# Altium PCB PCB4.PcbDoc
Units mm, origin at the board's own origin, x right, y up, seen from the top; angles counter-clockwise.
Board outline 106.55 x 74.17 mm, 2 copper layers (Top Layer, Bottom Layer); 16 components, 12 nets, 36 pads, 1 vias.
Unrouted connection lines stored in the file: 1.
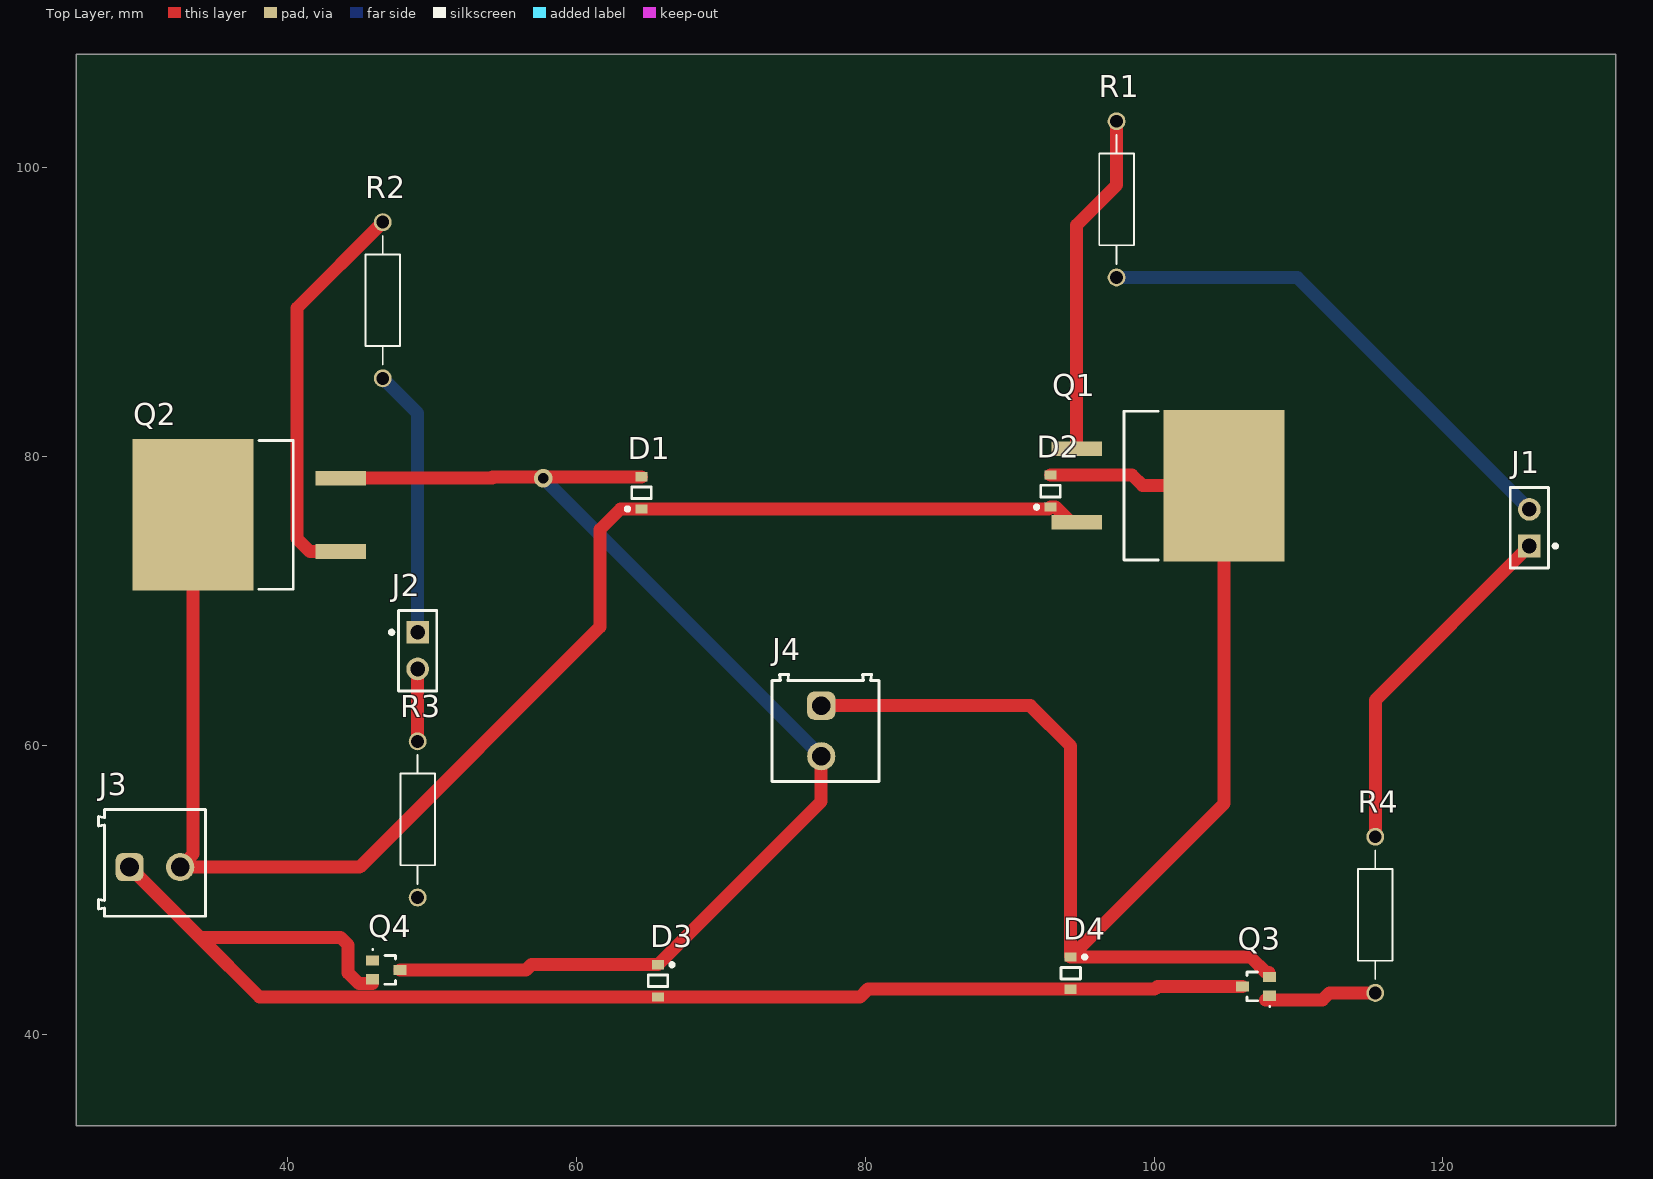
[diagram p0: Top Layer view]
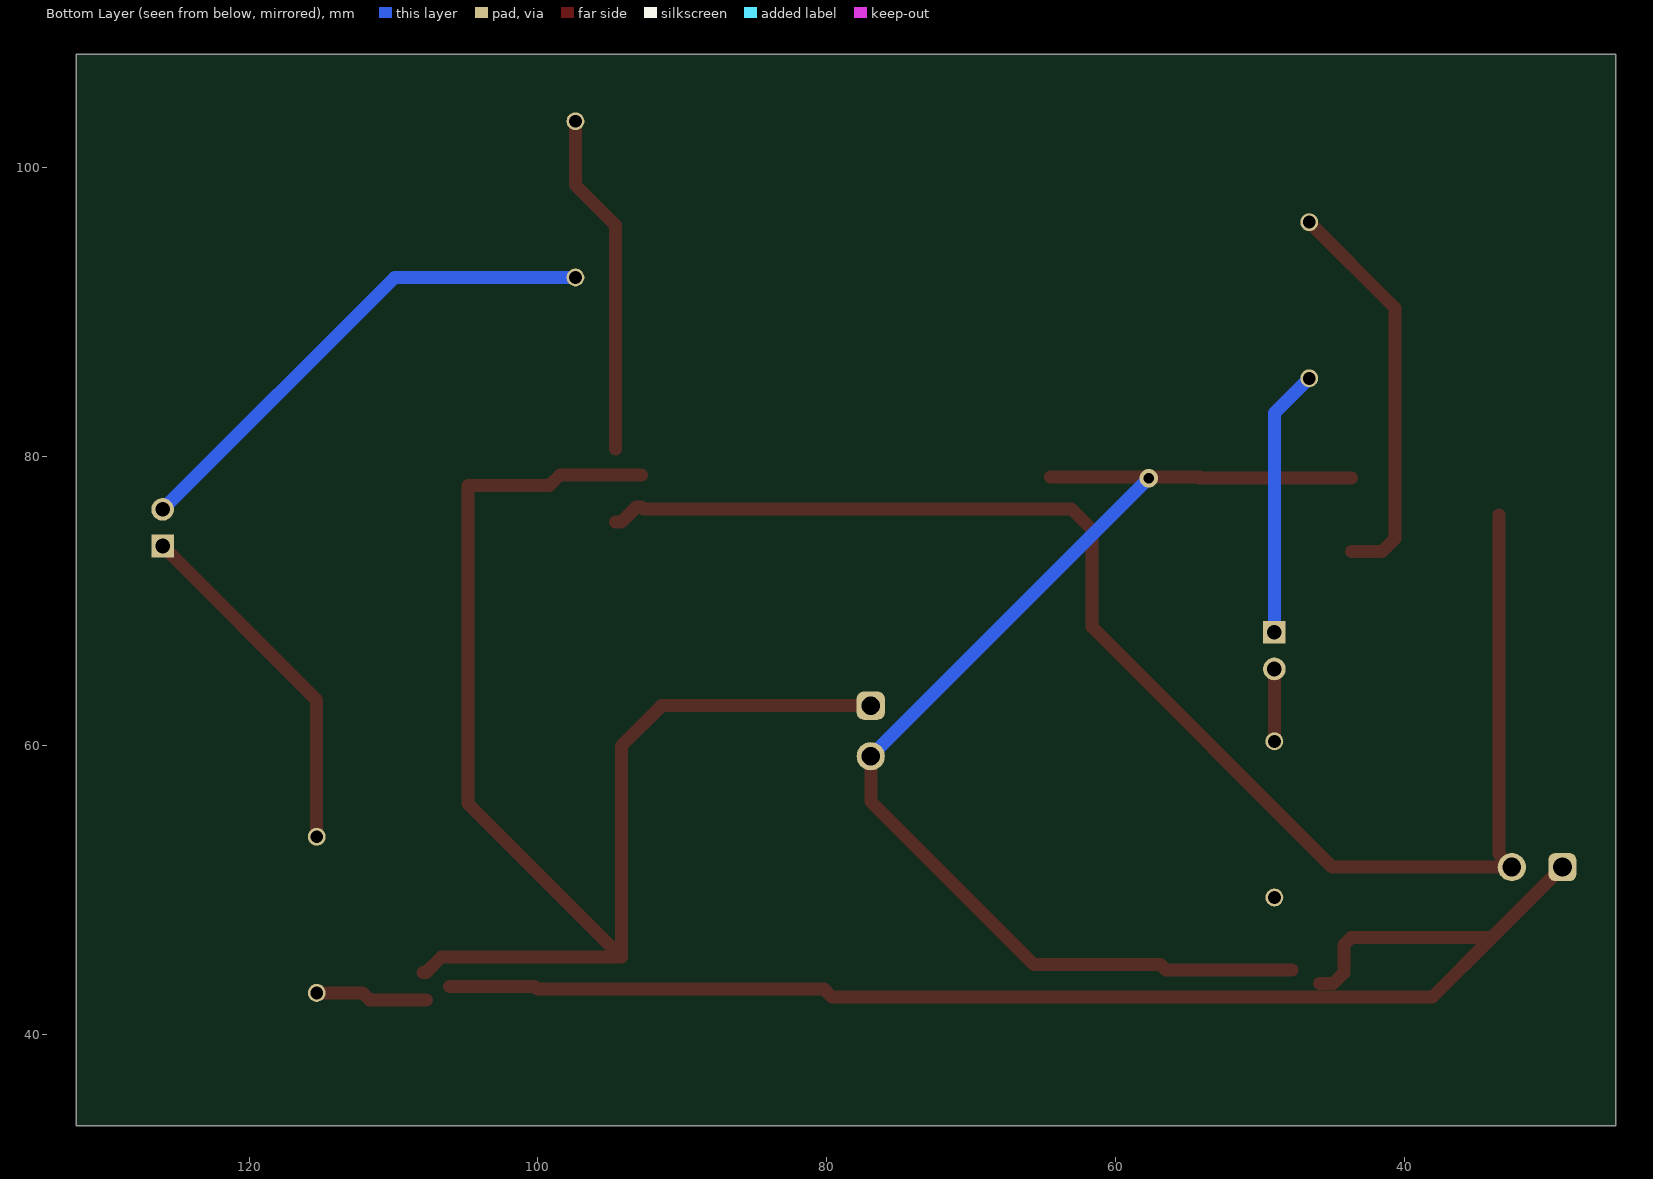
[diagram p1: Bottom Layer view, seen from below]
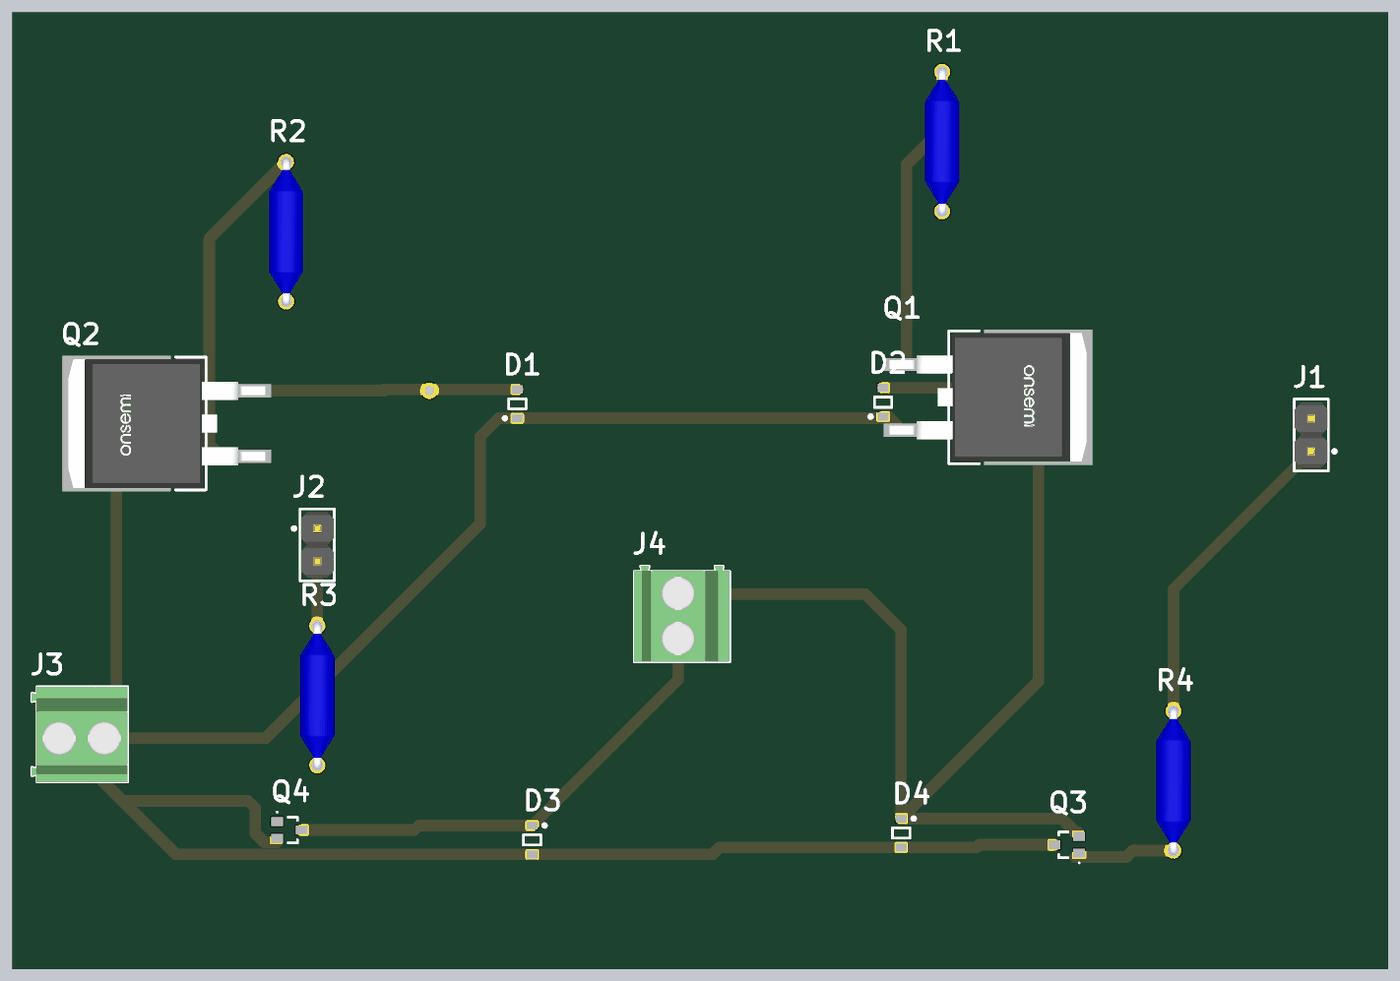
[diagram p2: 3D render of the assembled board from above, using the file's embedded part models]

## Layer stack, top to bottom
Top Solder: solder mask 0.0102, Solder Resist, Dk 3.5
Top Layer: signal copper 0.0356
Dielectric 1: dielectric 0.32, FR-4, Dk 4.8
Bottom Layer: signal copper 0.0356
Bottom Solder: solder mask 0.0102, Solder Resist, Dk 3.5

## Board outline
25.4,33.655 131.953,33.655 131.953,107.823 25.4,107.823

## Design rules (kind name [scope] priority, off if disabled: settings)
Clearance [All] p1: gap=0.8 ignorepadtopadclearanceinfootprint=FALSE
PolygonConnect [All] p1: connectstyle=Relief reliefconductorwidth=0.254 reliefentries=4 polygonreliefangle="90 Angle" airgapwidth=0.254
RoutingVias [All] p1: holewidth=0.711 width=1.27 viastyle="Through Hole" minholewidth=0.711 minwidth=1.27 maxholewidth=0.711 maxwidth=1.27
SolderMaskExpansion [All] p1: expansion=0.102 istentingtop=FALSE
UnRoutedNet [All] p1: checkbadconnections=TRUE
Width [All] p1: maxlimit=1 minlimit=0.75 preferedwidth=0.9
29 further rules are at their usual default settings.

## Components (designator, comment, footprint, x,y, rotation, side; value= is the part's Value field where it differs from the comment)
D1 "BAT54HT1G" ONSC-SOD-323-2-477-02_V 64.516,77.47 r90 top
D2 "BAT54HT1G" ONSC-SOD-323-2-477-02_V 92.837,77.597 r90 top
D3 "BAT54HT1G" ONSC-SOD-323-2-477-02_V 65.659,43.688 r270 top
D4 "BAT54HT1G" ONSC-SOD-323-2-477-02_V 94.234,44.224 r270 top
J1 "M20-9990245" FP-M20-9990245-MFG 125.984,75.057 r90 top
J2 "M20-9990245" FP-M20-9990245-MFG 49.022,66.548 r270 top
J3 "691214110002" 691214110002 30.833,51.862 r0 top
J4 "691214110002" 691214110002 77.262,60.988 r270 top
Q1 "NTB25P06T4G" FP-418B-04-MFG 102.743,77.978 r270 top
Q2 "NTB25P06T4G" FP-418B-04-MFG 35.588,75.946 r90 top
Q3 "2N7002WT1G" ONSC-SC-70-3-419-04_V 107.061,43.307 r180 top
Q4 "2N7002WT1G" ONSC-SC-70-3-419-04_V 46.863,44.45 r0 top
R1 "RNC55H3300BSRE6" RESAD1081W64L635D269 97.409,97.79 r270 top
R2 "RNC55H3300BSRE6" RESAD1081W64L635D269 46.609,90.805 r90 top
R3 "RNC55H3300BSRE6" RESAD1081W64L635D269 49.022,54.864 r270 top
R4 "RNC55H3300BSRE6" RESAD1081W64L635D269 115.316,48.26 r90 top

## Footprints (in the part's own frame and the unit in brackets; to place one, negate y for a bottom-side part, rotate by r counter-clockwise, add the part's x,y. Pads: shape width x height; smd on the part's side, far side on the other; paste and mask are expansions set on the pad)
691214110002 [mm] "3.50 mm Horizontal Entry Modular, 2p"
  rrect50% 1.95x1.95 hole 1.3: 1(-1.75,-0.3)
  round 1.95 hole 1.3: 2(1.75,-0.3)
  silkscreen extent -3.9,-3.7 3.5,3.7, body extent -3.95,-3.7 3.5,3.7, height 8.55
FP-418B-04-MFG [mm]
  rect 1.016x3.504 smd paste+0 mask+0: 1(-2.54,-8.101) 3(2.54,-8.101)
  rect 10.49x8.38 smd paste+0 mask+0: 4(0,2.113)
  silkscreen extent -5.15,-4.82 5.15,-2.45, body extent -5.35,-9.95 5.35,6.4, height 0.25
FP-M20-9990245-MFG [mm]
  rect 1.57x1.57 hole 1.02 paste-2539.97 mask+0: 1(-1.27,0)
  round 1.57 hole 1.02 paste-2539.97 mask+0: 2(1.27,0)
  silkscreen extent -2.79,-1.92 2.79,1.32, body extent -2.89,-1.42 2.89,1.42, height 0.25
ONSC-SC-70-3-419-04_V [mm] "SOT23, 3-Leads, Body 2x1.25mm, Pitch 0.65mm"
  rect 0.9x0.7 smd: 1(-0.95,0.65) 2(-0.95,-0.65) 3(0.95,0)
  silkscreen extent -1,-1 0.62,1.45, body extent -0.63,-1 0.63,1, height 1
ONSC-SOD-323-2-477-02_V [mm] "SOD, 2-Leads, Body 1.7x1.25mm"
  rect 0.63x0.83 smd: 1(-1.115,0) 2(1.115,0)
  silkscreen extent -1.24,-0.67 0.4,1.09, body extent -0.85,-0.63 0.85,0.63, height 1.06
RESAD1081W64L635D269 [mm]
  round 1.24 hole 0.89: 1(-5.405,0) 2(5.405,0)
  silkscreen extent -4.47,-1.2 4.47,1.2, body extent -5.72,-1.35 5.72,1.35, height 2.69

## Part data
D1 D2 D3 D4: library part CMP-1055-00462-1, "Schottky Barrier Diode, 2-Pin SOD-323, Pb-Free, Tape and Reel", Manufacturer="On Semiconductor", ComponentLink1Description="Manufacturer URL", ComponentLink1URL=http://www.onsemi.com/, ComponentLink2Description=Datasheet, ComponentLink2URL=http://www.onsemi.cn/pub_link/Collateral/BAT54HT1-D.PDF, ComponentLink3Description="Package Specification", ComponentLink3URL=http://www.onsemi.com/pub_link/Collateral/477-02.PDF.1, Configuration=Single, DatasheetVersion="Rev. 6", IFSM Max (A)=0.6, Mounting Technology="Surface Mount", PackageDescription="2-Pin SOD, Body 1.7 x 1.25 mm", PackageReference=SOD-323-2-477-02, PackageVersion="Rev. H, 03/2007", Packing="Tape and Reel", PartNumber=BAT54HT1G, RoHS=TRUE, trr Max (ns)=5
J1 J2: library part CMP-15831-000105-1, "CONN HEADER VERT 2POS 2.54MM", Case/Package=SIL, Color=Black, Contact Resistance=25mR, Current=3A, Flammability Rating="UL94 V-0", Insulation Resistance=10GR, Max Operating Temperature=105°C, Min Operating Temperature=-40°C, Package Quantity=1000, Voltage=50V, Voltage Rating (AC)=750V, Connector Type="Male Pin", Contact Finish - Mating=GOLD, Contact Material=Brass, Contact Mating Length=0.24inch, Contact Plating=Gold, Contact Shape=Square, Contact Type="Male Pin", Current Rating=3A, Depth=2.54mm, Fastening Type=Pull, Gender=Male, Height=0.12inch, Housing Color=Black, Housing Material=Nylon, Insulation Color=Black, Insulation Material=Nylon, Lead Pitch=2.54mm, Length=5.08mm, Mated Stacking Heights=16.54mm, Mating Cycles=300, Max Current Rating=3A, Mount="Through Hole", Number of Contacts=2, Number of Poles=2, Number of Positions=2, Number of Rows=1, Orientation=Straight, Packaging=Bulk, Pitch=2.54mm, Radiation Hardening=No, Reach SVHC Compliant=Yes, Series=M20, Termination=Solder, Weight=0.25lb, Width=0.25inch, Working Voltage=750V
J3 J4: library part CMP-1502-02464-2, Color="Blue, Green", Current=10A, Max Operating Temperature=105°C, Min Operating Temperature=-40°C, Voltage=300V, Contact Material=Brass, Contact Plating="Brass, Tin", Current Rating=10A, Height=8.7mm, Housing Material=Nylon, Lead Pitch=3.5mm, Length=7.4mm, Mount="Through Hole", NexarPartId=18818288, Number of Contacts=2, Number of Levels=1, Number of Pins=2, Number of Positions Per Level=2, Number of Rows=1, Packaging=Box, Pitch=3.5052mm, Plating="Brass, Steel", REACH SVHC=Unknown, RoHS=Compliant, Stripping Length=-6mm, Termination=Screw, Voltage Rating=300V, Width=7.9mm, Wire Gauge (Max)=24AWG, Wire Gauge (Min)=16AWG, Wire/Cable Gauge=24AWG
Q1 Q2: library part CMP-1058-00100-2, Case/Package=D2PAK, Continuous Drain Current (ID)=27.5A, Current Rating=-25A, Drain to Source Breakdown Voltage=-60V, Drain to Source Resistance=65mΩ, Gate to Source Voltage (Vgs)=15V, Input Capacitance=1.68nF, Manufacturer Lifecycle Status=ACTIVE, Max Junction Temperature (Tj)=175°C, Max Power Dissipation=120W, Min Operating Temperature=-55°C, Contact Plating=Tin, Drain to Source Voltage (Vdss)=-60V, Element Configuration=Single, Fall Time=190ns, Height=4.83mm, Lead Free="Lead Free", Length=10.29mm, Lifecycle Status=Production, Max Operating Temperature=175°C, NexarPartId=341266, Number of Channels=1, Number of Elements=1, Number of Pins=3, Packaging=Digi-Reel®, Power Dissipation=120W, Radiation Hardening=No, Rds On Max=82mΩ, Rise Time=72ns, RoHS=Compliant, Schedule B="8541290080, 8541290080", Turn-Off Delay Time=43ns, Turn-On Delay Time=14ns, Voltage Rating (DC)=-60V, Width=9.65mm
Q3 Q4: library part CMP-1058-00618-1, "Small Signal MOSFET, 60 V, 340 mA, Single, N-Channel, 3-Pin SC70, Pb-Free, Tape and Reel", Manufacturer="On Semiconductor", Package Type="SC-70-3 / SOT-323-3", Channel Polarity="N Channel", Ciss Typ (pF)=24.5, ComponentLink1Description="Manufacturer URL", ComponentLink1URL=http://www.onsemi.com/, ComponentLink2Description=Datasheet, ComponentLink2URL=http://www.onsemi.com/pub_link/Collateral/2N7002W-D.PDF, ComponentLink3Description="Package Specification", ComponentLink3URL=http://www.onsemi.cn/pub_link/Collateral/419-04.PDF, Configuration=Single, Coss Typ (pF)=4.2, Crss Typ (pF)=2.2, DatasheetVersion="Rev. 5", ID Max (A)=0.34, Mounting Technology="Surface Mount", PackageDescription="3-Pin Small Outline Transistor, Body 2 x 1.25 mm, Pitch 0.65 mm", PackageReference=SC-70-3-419-04, PackageVersion="Rev. N, 11/2008", Packing="Tape and Reel", PartNumber=2N7002WT1G, RoHS=Pb-Free, V(BR)DSS Min (V)=60, VGS Max (V)=20, VGS(th) Max (V)=2.5
R1 R2 R3 R4: "330 Ohms Â±0.1% 0.125W, 1/8W Through Hole Resistor Axial Military, Moisture Resistant, Weldable Metal Film", Package="erc55 Vishay", Check_prices=https://www.snapeda.com/parts/RNC55H3300BSRE6/Vishay/view-part/?ref=eda, MF=Vishay, MP=RNC55H3300BSRE6, SnapEDA_Link=https://www.snapeda.com/parts/RNC55H3300BSRE6/Vishay/view-part/?ref=snap

## Via types
v1: diameter 1.27, hole 0.711, Top Layer to Bottom Layer, 1 vias

## Nets (pads, with @x,y where several pads share a name; then routed paths per layer and width w, separated by ;. In a path a pad name is that pad's centre, name@x,y a point inside that pad or via, vN(x,y) a via of type N, cw(c..) or ccw(c..) an arc to the next point about the centre after c; other vN are vias at no path point)
NetD1_1: D1.1 D2.1 J3.2 Q1.3 Q2.4 | length 101.5
  Top Layer w0.9: Q2.4 33.475,52.454 J3.2 45.009,51.562 61.646,68.199 61.646,74.93 63.071,76.355 D1.1 92.71,76.355 D2.1 93.193,76.482 94.237,75.438 Q1.3
NetD1_2: D1.2 D3.1 J4.2 Q2.3 Q4.3 | length 85.4
  Top Layer w0.9: Q2.3 54.201,78.486 54.201,78.585 v1@57.714,78.585 ; Q4.3 56.54,44.45 56.893,44.803 D3.1 76.962,56.106 J4.2 ; v1(57.714,78.486) v1@57.714,78.585 ; D1.2 v1@57.714,78.585
  Bottom Layer w0.9: v1(57.714,78.486) J4.2
NetD2_2: D2.2 D4.1 J4.1 Q1.4 Q3.2 | length 96.6
  Top Layer w0.9: J4.1 91.44,62.738 94.234,59.944 D4.1 ; D2.2 98.476,78.712 99.21,77.978 Q1.4 104.856,55.961 D4.1 ; Q3.2@107.95,44.257 107.762,44.257 106.68,45.339 D4.1
NetD3_2: D3.2 D4.2 J3.1 Q3.3 Q4.2 | length 95.5
  Top Layer w0.9: J3.1 33.945,46.7 ; Q4.2@45.913,43.5 44.945,43.5 44.213,44.232 44.213,46.173 43.686,46.7 33.945,46.7 ; Q3.3 100.249,43.307 100.051,43.109 D4.2 80.19,43.109 79.654,42.573 D3.2 38.072,42.573 33.945,46.7
NetJ1_1: J1.1 R4.2 | length 24.5
  Top Layer w0.9: R4.2 115.316,63.119 J1.1
NetJ1_2: J1.2 R1.2 | length 35.2
  Bottom Layer w0.9: R1.2 109.926,92.385 J1.2
NetJ2_1: J2.1 R2.1 | length 18.6
  Bottom Layer w0.9: R2.1 49.022,82.987 J2.1
NetJ2_2: J2.2 R3.1 | length 5
  Top Layer w0.9: R3.1 J2.2
NetQ1_1: Q1.1 R1.1 | length 23.8
  Top Layer w0.9: Q1.1 94.642,96.014 97.409,98.781 R1.1
NetQ2_1: Q2.1 R2.2 | length 27.8
  Top Layer w0.9: Q2.1 41.554,73.406 40.665,74.295 40.665,90.266 R2.2
NetQ3_1: Q3.1 R4.1 | length 7.8
  Top Layer w0.9: Q3.1@107.729,42.357 111.655,42.357 112.153,42.855 R4.1
NetQ4_1: Q4.1 R3.2